# EAGLE board DF32-revision-D (EAGLE 6.6.0)
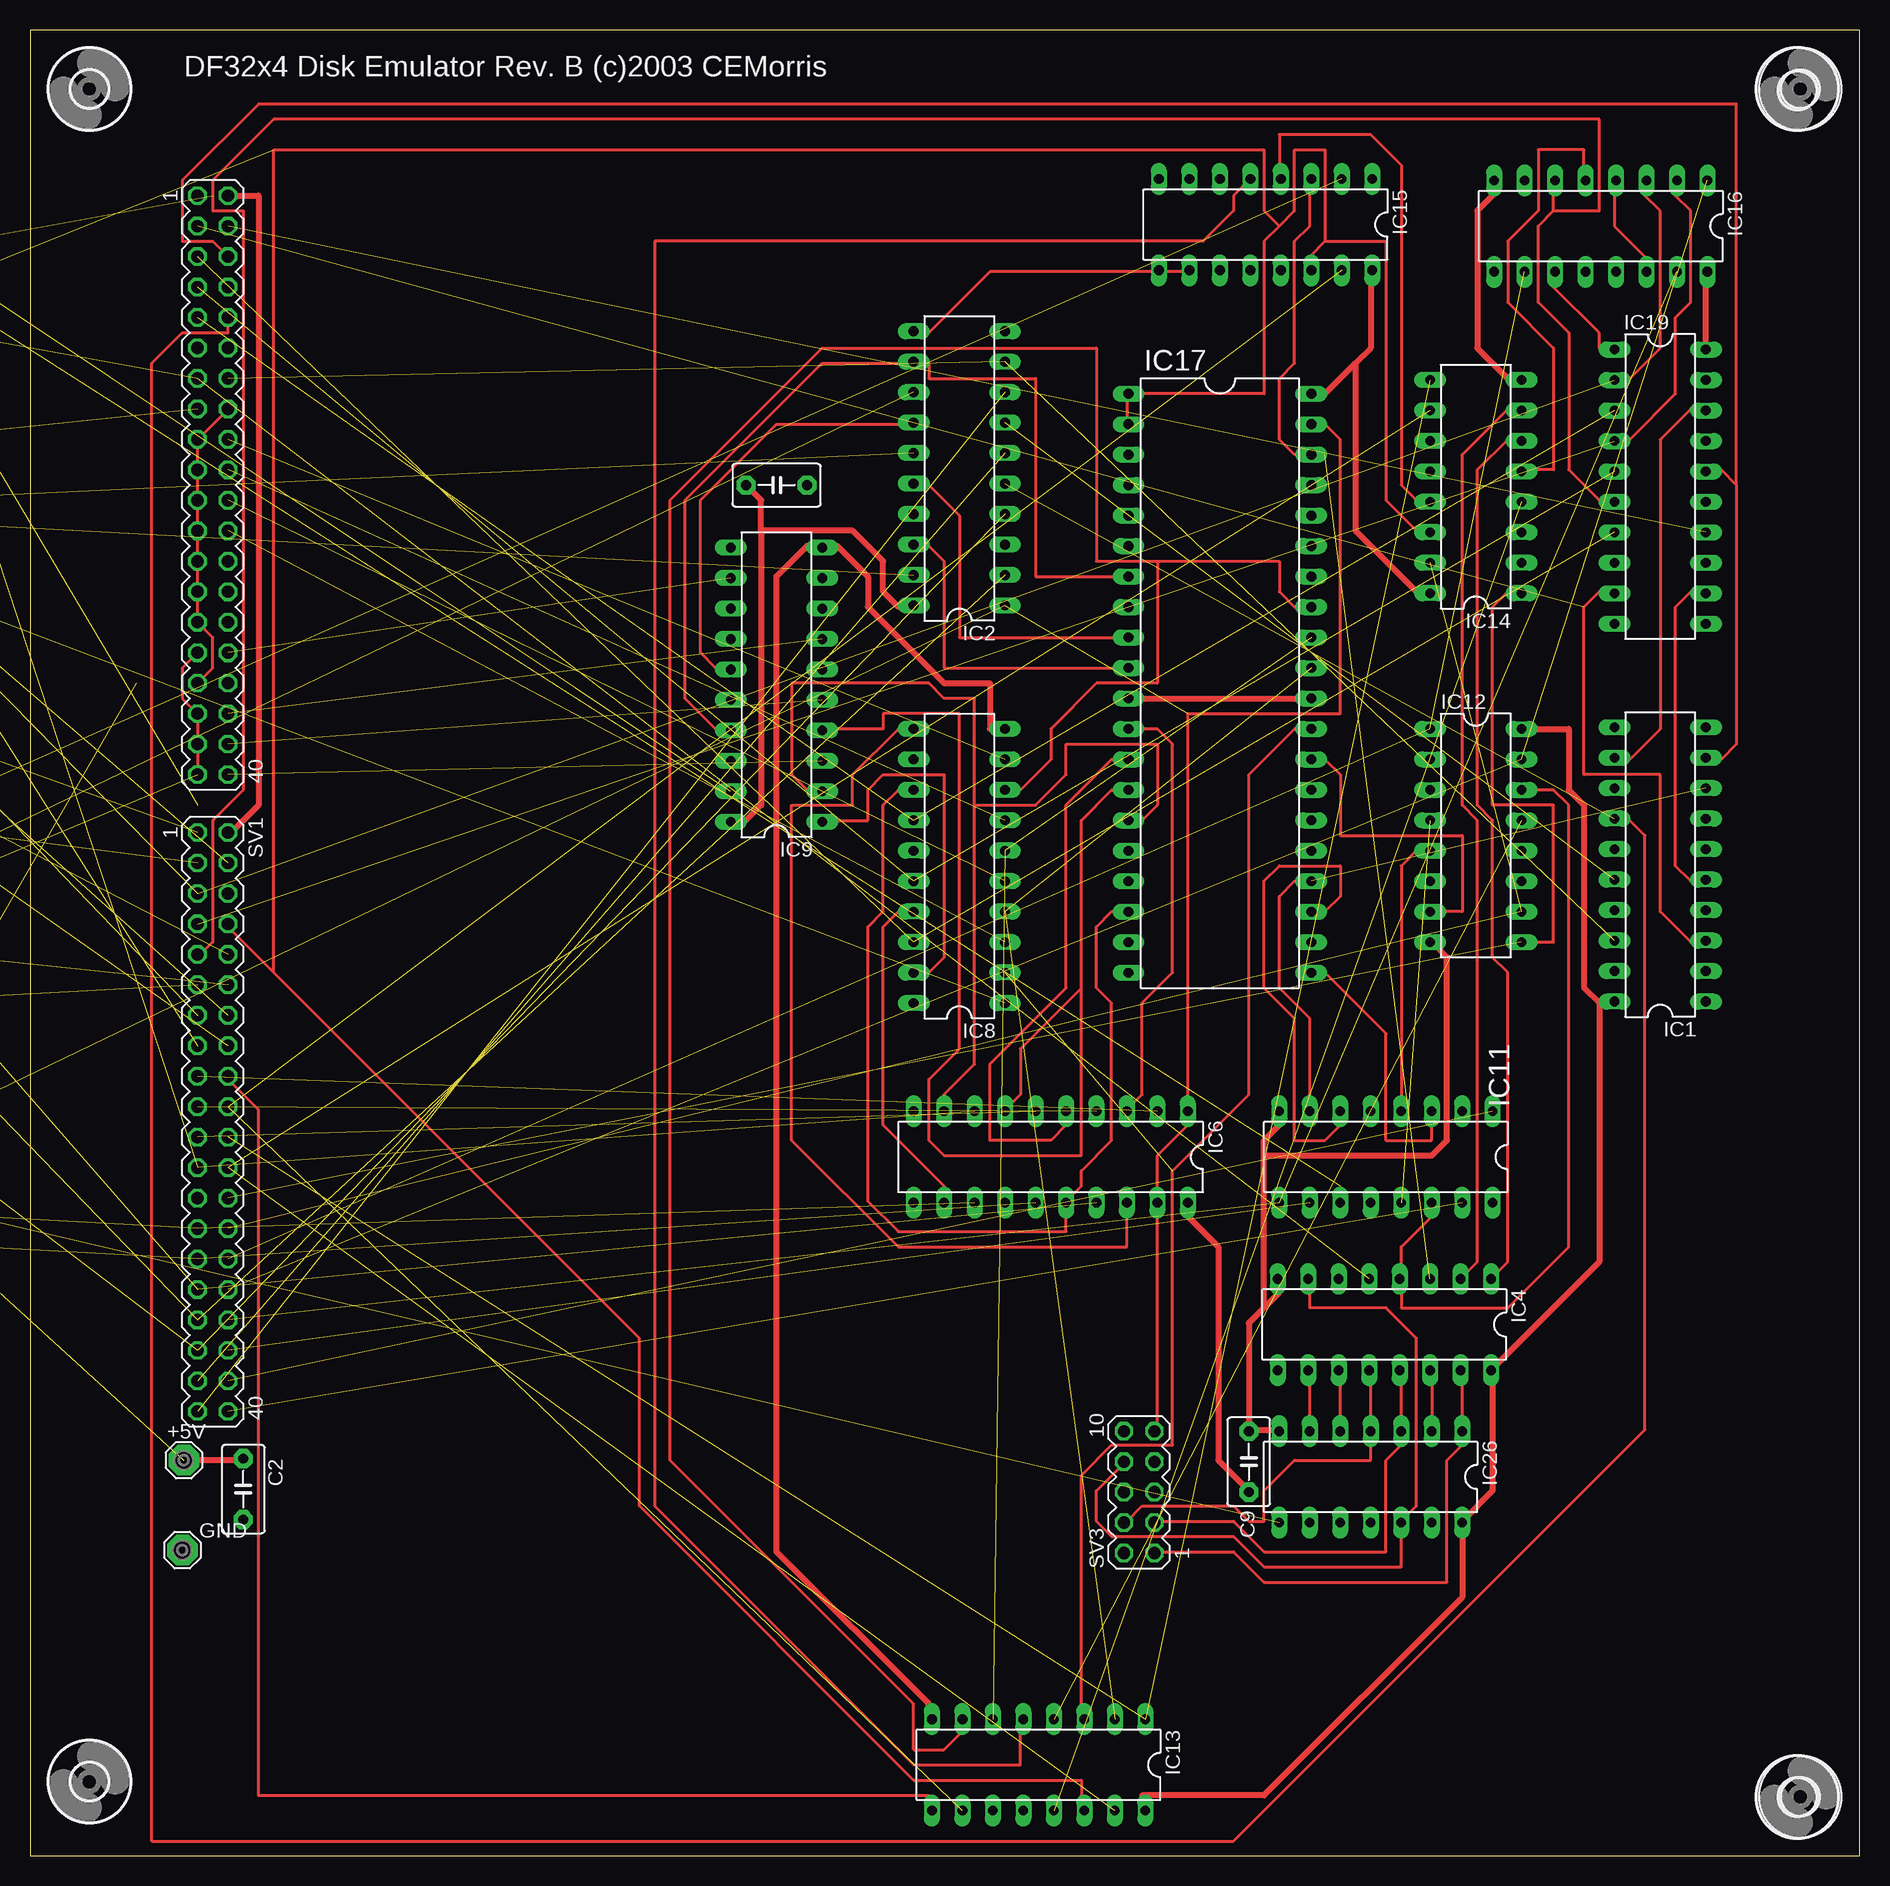
[diagram p0: board, top side]
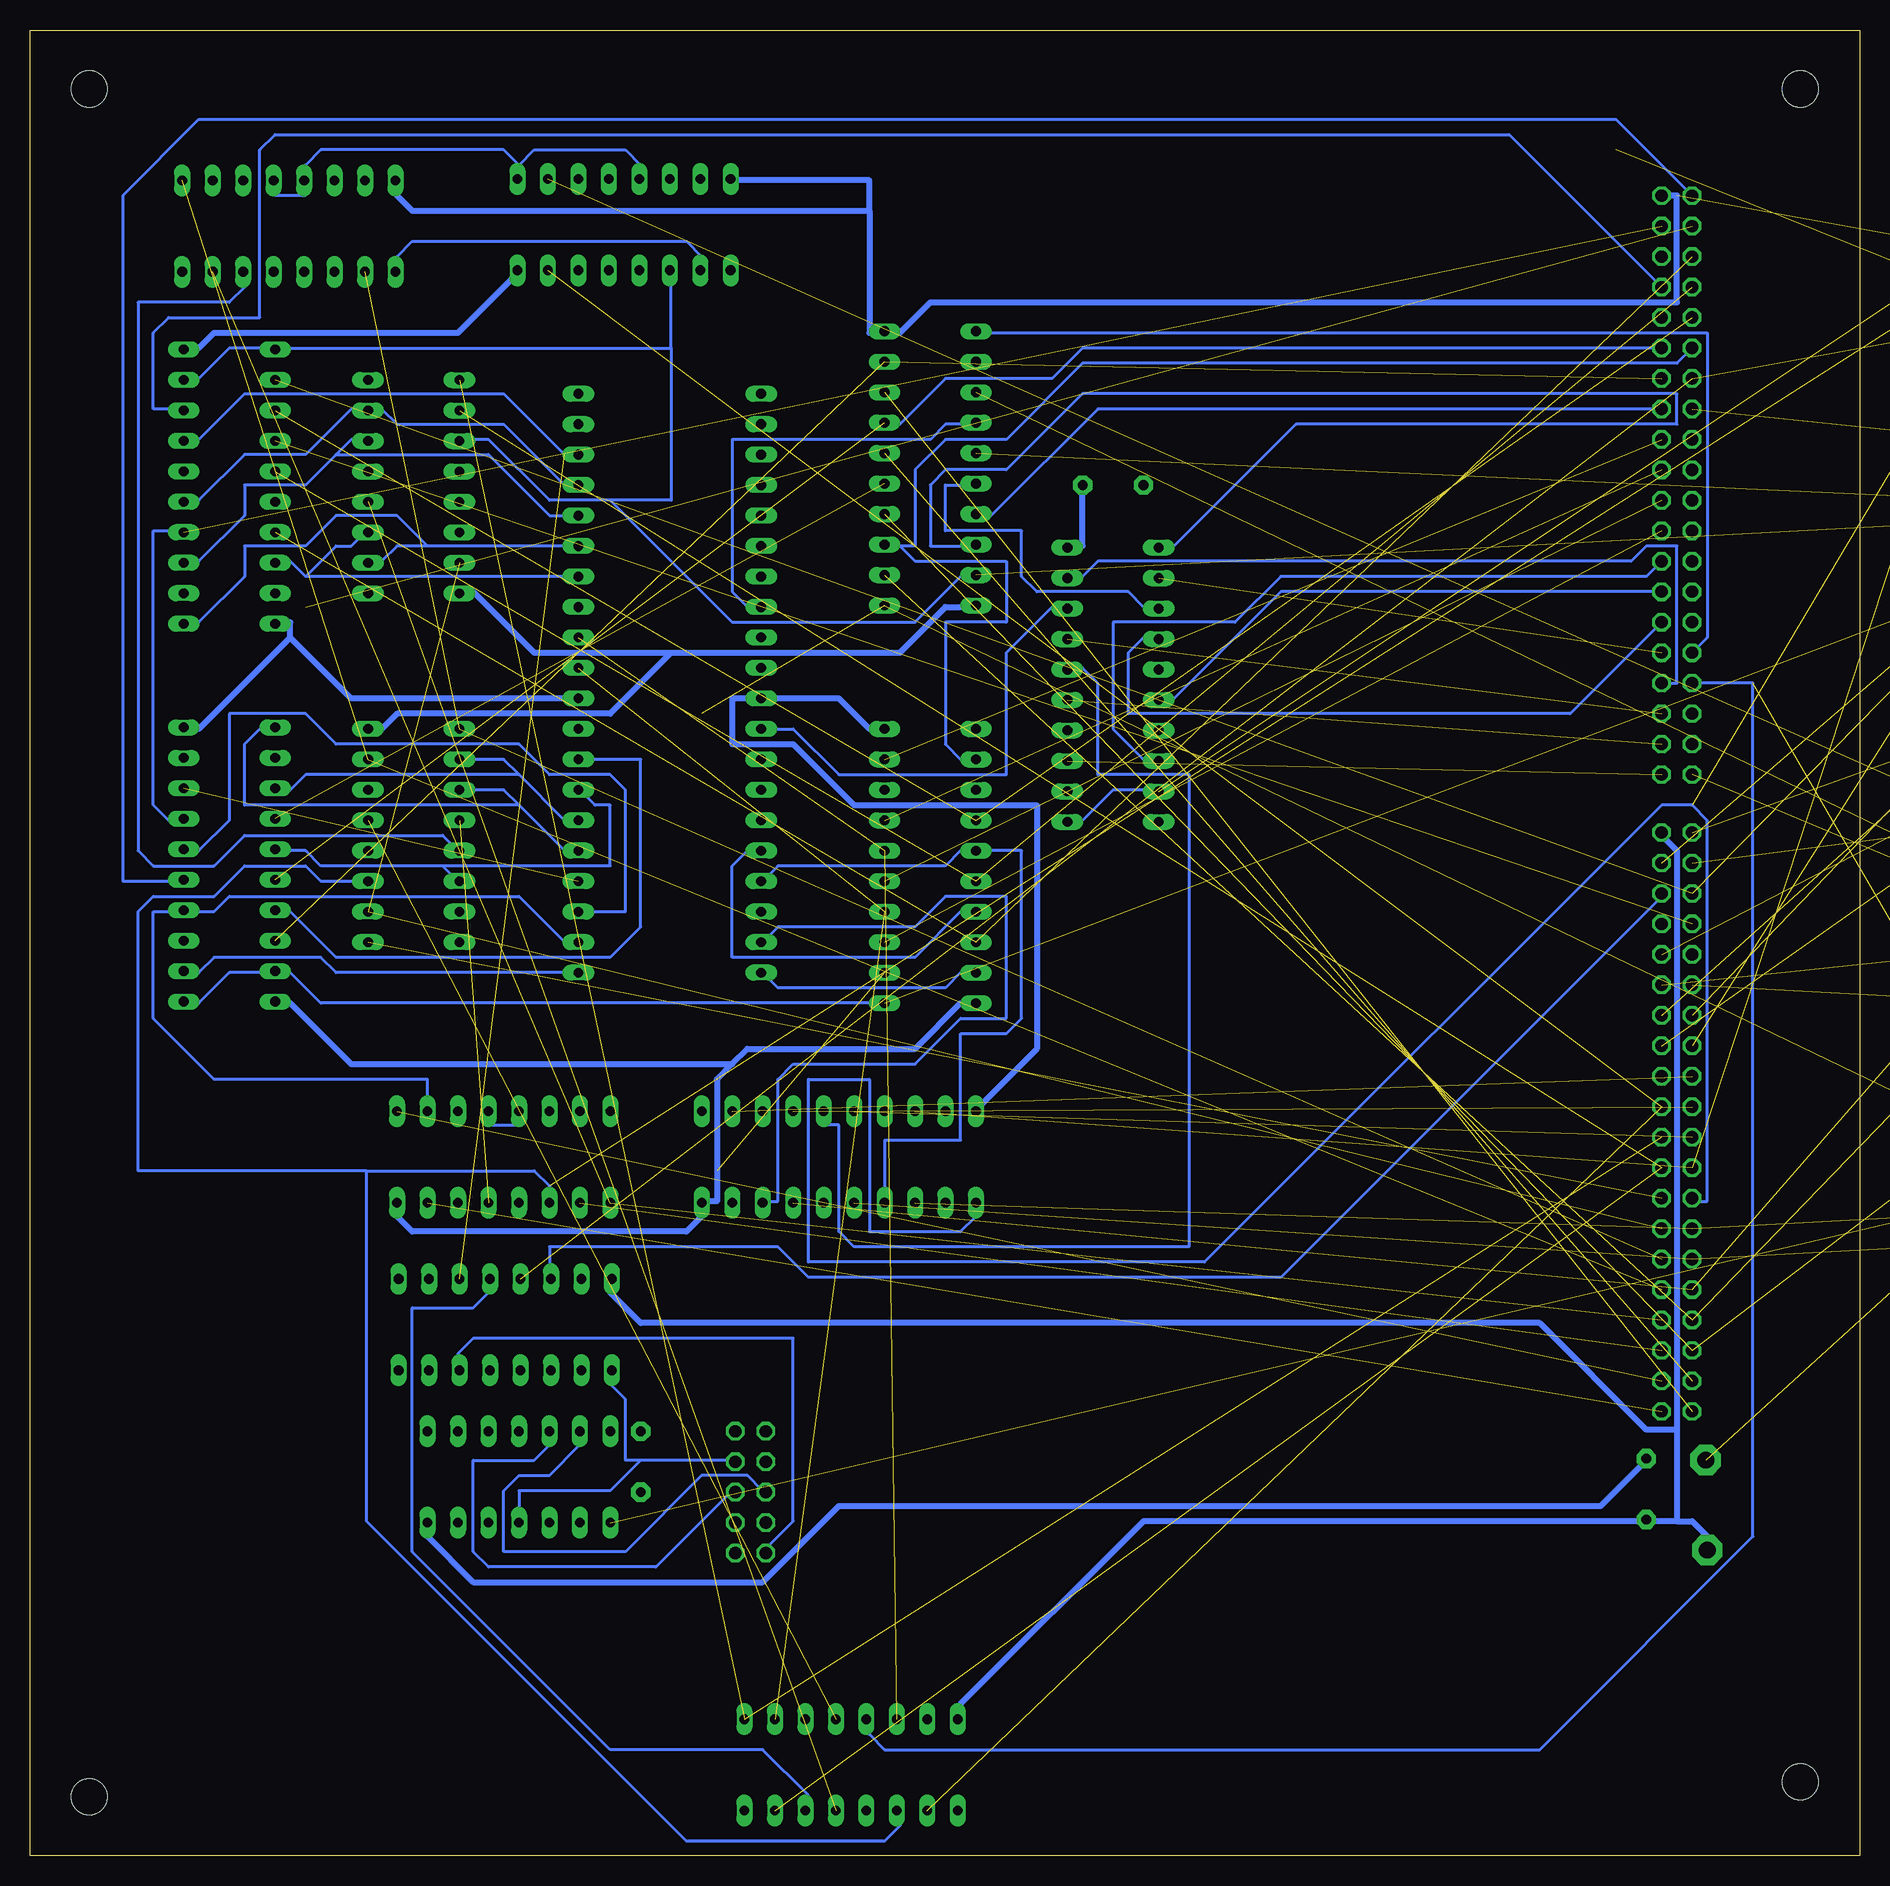
[diagram p1: board, bottom side, seen from below]

Size 152.51 x 152.2 mm. Coordinates in mm from the lower left corner, seen from the top.
Outline: 0,0 152.51,0 152.51,152.2 0,152.2 0,0
Copper layers (1*16): Top 0.035mm / dielectric 1.5mm / Bottom 0.035mm
Design rules "10mils": minimum track width 10mil, minimum drill 24mil, track to track 10mil, track to pad 10mil, pad to pad 10mil, via to via 10mil, smd to smd 10mil, copper to edge 40mil, drill to drill 10mil, minimum pad ring 10mil, minimum via ring 8mil, stop-mask expansion 0mil, vias tented up to drill 0mil, thermal gap 10mil
Net classes: 1 supply: width 0.508 mm

## Footprints (pad centres in the part's own frame; a part is rotated, then mirrored left to right if it is on the bottom)
SE14 = drill 1.397 pad 2.54 octagon: MP 0,0
C5B3.5 = drill 0.813 pad 1.6 octagon: 1 -2.54,0; 2 2.54,0
C-2,5 = drill 0.813 pad 1.6 octagon: 1 -1.27,0; 2 1.27,0
DIL20 = drill 0.813 long: 1 -11.43,-3.81; 2 -8.89,-3.81; 3 -6.35,-3.81; 4 -3.81,-3.81; 5 -1.27,-3.81; 6 1.27,-3.81; 7 3.81,-3.81; 8 6.35,-3.81; 9 8.89,-3.81; 10 11.43,-3.81; 11 11.43,3.81; 12 8.89,3.81; 13 6.35,3.81; 14 3.81,3.81; 15 1.27,3.81; 16 -1.27,3.81; 17 -3.81,3.81; 18 -6.35,3.81; 19 -8.89,3.81; 20 -11.43,3.81
DIL14 = drill 0.813 long: 1 -7.62,-3.81; 2 -5.08,-3.81; 3 -2.54,-3.81; 4 0,-3.81; 5 2.54,-3.81; 6 5.08,-3.81; 7 7.62,-3.81; 8 7.62,3.81; 9 5.08,3.81; 10 2.54,3.81; 11 0,3.81; 12 -2.54,3.81; 13 -5.08,3.81; 14 -7.62,3.81
DIL16 = drill 0.813 long: 1 -8.89,-3.81; 2 -6.35,-3.81; 3 -3.81,-3.81; 4 -1.27,-3.81; 5 1.27,-3.81; 6 3.81,-3.81; 7 6.35,-3.81; 8 8.89,-3.81; 9 8.89,3.81; 10 6.35,3.81; 11 3.81,3.81; 12 1.27,3.81; 13 -1.27,3.81; 14 -3.81,3.81; 15 -6.35,3.81; 16 -8.89,3.81
DIL40 = drill 0.813 long: 1 -24.13,-7.62; 2 -21.59,-7.62; 3 -19.05,-7.62; 4 -16.51,-7.62; 5 -13.97,-7.62; 6 -11.43,-7.62; 7 -8.89,-7.62; 8 -6.35,-7.62; 9 -3.81,-7.62; 10 -1.27,-7.62; 11 1.27,-7.62; 12 3.81,-7.62; 13 6.35,-7.62; 14 8.89,-7.62; 15 11.43,-7.62; 16 13.97,-7.62; 17 16.51,-7.62; 18 19.05,-7.62; 19 21.59,-7.62; 20 24.13,-7.62; 21 24.13,7.62; 22 21.59,7.62; 23 19.05,7.62; 24 16.51,7.62; 25 13.97,7.62; 26 11.43,7.62; 27 8.89,7.62; 28 6.35,7.62; 29 3.81,7.62; 30 1.27,7.62; 31 -1.27,7.62; 32 -3.81,7.62; 33 -6.35,7.62; 34 -8.89,7.62; 35 -11.43,7.62; 36 -13.97,7.62; 37 -16.51,7.62; 38 -19.05,7.62; 39 -21.59,7.62; 40 -24.13,7.62
TO92 = drill 0.813 octagon: 1 1.27,0; 2 0,1.905; 3 -1.27,0
R-5 = drill 0.813 pad 1.6 octagon: 1 -2.54,0; 2 2.54,0
R-7,5 = drill 0.813 pad 1.6 octagon: 1 -3.81,0; 2 3.81,0
MA20-2 = drill 1.016 octagon: 1 -24.13,-1.27; 2 -24.13,1.27; 3 -21.59,-1.27; 4 -21.59,1.27; 5 -19.05,-1.27; 6 -19.05,1.27; 7 -16.51,-1.27; 8 -16.51,1.27; 9 -13.97,-1.27; 10 -13.97,1.27; 11 -11.43,-1.27; 12 -11.43,1.27; 13 -8.89,-1.27; 14 -8.89,1.27; 15 -6.35,-1.27; 16 -6.35,1.27; 17 -3.81,-1.27; 18 -3.81,1.27; 19 -1.27,-1.27; 20 -1.27,1.27; 21 1.27,-1.27; 22 1.27,1.27; 23 3.81,-1.27; 24 3.81,1.27; 25 6.35,-1.27; 26 6.35,1.27; 27 8.89,-1.27; 28 8.89,1.27; 29 11.43,-1.27; 30 11.43,1.27; 31 13.97,-1.27; 32 13.97,1.27; 33 16.51,-1.27; 34 16.51,1.27; 35 19.05,-1.27; 36 19.05,1.27; 37 21.59,-1.27; 38 21.59,1.27; 39 24.13,-1.27; 40 24.13,1.27
MA05-2 = drill 1.016 octagon: 1 -5.08,-1.27; 2 -5.08,1.27; 3 -2.54,-1.27; 4 -2.54,1.27; 5 0,-1.27; 6 0,1.27; 7 2.54,-1.27; 8 2.54,1.27; 9 5.08,-1.27; 10 5.08,1.27
MA04-2 = drill 1.016 octagon: 1 -3.81,-1.27; 2 -3.81,1.27; 3 -1.27,-1.27; 4 -1.27,1.27; 5 1.27,-1.27; 6 1.27,1.27; 7 3.81,-1.27; 8 3.81,1.27
3,0 = hole 3: 0,0

## Placement (x,y rotation side)
+5V  SE14  [SE14]  12.82,32.98 0 top
C1  [C5B3.5]  -61.85,48.1 90 top  (outside the outline)
C2  [C5B3.5]  17.78,30.57 270 top
C3  [C5B3.5]  -41.91,116.93 0 top  (outside the outline)
C4  [C5B3.5]  -44.46,91.02 0 top  (outside the outline)
C5  [C5B3.5]  -59.19,72.99 0 top  (outside the outline)
C6  [C5B3.5]  -29.98,47.08 0 top  (outside the outline)
C7  [C5B3.5]  -17.79,63.34 90 top  (outside the outline)
C8  [C5B3.5]  -60.97,123.15 90 top  (outside the outline)
C9  [C5B3.5]  101.59,32.86 90 top
C10  [C5B3.5]  62.22,114.26 0 top
C11  [C-2,5]  -27.95,68.54 0 top  (outside the outline)
GND  SE14  [SE14]  12.69,25.49 0 top
IC1  74LS240N  [DIL20]  135.88,82.64 90 top
IC2  74LS244N  [DIL20]  77.47,115.66 90 top
IC3  74LS00N  [DIL14]  -10.17,126.84 90 top  (outside the outline)
IC4  74LS138N  [DIL16]  112.9,44.29 180 top
IC5  74LS32N  [DIL14]  -45.6,58.26 90 top  (outside the outline)
IC6  74LS244N  [DIL20]  85.09,58.26 180 top
IC7  74LS74N  [DIL14]  -43.19,106.64 90 top  (outside the outline)
IC8  74LS240N  [DIL20]  77.47,82.51 90 top
IC9  74LS240N  [DIL20]  62.22,97.62 90 top
IC10  74LS04N  [DIL14]  -29.21,128.1 180 top  (outside the outline)
IC11  74LS191N  [DIL16]  113.03,58.26 180 top
IC12  74LS191N  [DIL16]  120.52,85.05 270 top
IC13  74LS191N  [DIL16]  84.07,7.58 180 top
IC14  74LS191N  [DIL16]  120.52,114.14 90 top
IC15  74LS191N  [DIL16]  102.99,135.98 180 top
IC16  74LS191N  [DIL16]  130.93,135.85 180 top
IC17  DS1258  [DIL40]  99.18,97.75 270 top
IC18  74LS74N  [DIL14]  -45.73,81.24 90 top  (outside the outline)
IC19  74LS240N  [DIL20]  135.88,114.14 270 top
IC20  74LS02N  [DIL14]  -30.48,81.37 90 top  (outside the outline)
IC21  74LS01N  [DIL14]  -28.07,106.64 90 top  (outside the outline)
IC22  74LS155N  [DIL16]  -15.25,80.1 90 top  (outside the outline)
IC24  74LS155N  [DIL16]  -15.25,105.37 90 top  (outside the outline)
IC25  74LS74N  [DIL14]  -58.43,63.46 90 top  (outside the outline)
IC26  74LS30N  [DIL14]  111.76,31.59 180 top
IC27  74LS86N  [DIL14]  -30.36,58.38 90 top  (outside the outline)
IC28  74LS07N  [DIL14]  -58.43,93.81 90 top  (outside the outline)
Q1  2N3904  [TO92]  -53.35,132.04 0 top  (outside the outline)
R1  1K  [R-5]  -21.85,62.95 270 top  (outside the outline)
R2  1K  [R-7,5]  -13.98,62.19 270 top  (outside the outline)
R3  220  [R-5]  -58.43,106.64 180 top  (outside the outline)
R4  220  [R-5]  -47.12,43.14 180 top  (outside the outline)
R5  220  [R-5]  -49.54,48.22 270 top  (outside the outline)
R6  0  [R-5]  -10.17,62.32 270 top  (outside the outline)
R7  4.7K  [R-5]  -53.35,128.23 180 top  (outside the outline)
SV1  BUS1  [MA20-2]  15.23,61.18 270 top
SV2  BUS2  [MA20-2]  15.23,114.26 270 top
SV3  WRLOCK  [MA05-2]  92.45,30.32 90 top
SV4  PANEL LEDS  [MA04-2]  -55.76,48.22 270 top  (outside the outline)
U$1  [3,0]  4.95,147.28 0 top
U$2  [3,0]  4.95,6.18 0 top
U$3  [3,0]  147.57,4.92 0 top
U$4  [3,0]  147.57,147.28 0 top

## Library data of the parts
+5V GND = solpad
C1-C10 = capacitor-wima
C11 R1-R7 = discrete
IC1-IC16 IC18-IC22 IC24-IC28 = 74xx-us
IC17 = maxim
Q1 = transistor-npn
SV1-SV4 = con-lstb; OC_FARNELL: unknown; OC_NEWARK: unknown
U$1-U$4 = holes

## Nets
0V: IC2.17 IC7.2 IC7.12 IC11.4 IC11.5 IC12.5 IC13.5 IC14.5 IC15.1 IC15.5 IC16.4 IC16.5 IC16.14 R6.1 SV2.16 SV2.17 SV2.19 SV2.21 SV2.23 SV2.25 SV2.27 SV2.29 SV2.33
!660-663: IC5.8 IC22.2 IC24.2 IC24.14
!(NED+EWL): IC2.13 IC20.1
!ACBUS0: IC2.3 IC8.12 SV2.11
!ACBUS1: IC8.14 IC19.3 SV2.9
!ACBUS2: IC8.16 IC19.5 SV2.7
!ACBUS3: IC8.18 IC19.7 SV2.5
!ACBUS4: IC1.3 IC19.9 SV2.3
!ACBUS5: IC1.5 IC19.12 SV2.1
!ACBUS6: IC1.7 IC19.14 SV2.4
!ACBUS7: IC1.9 IC19.16 SV2.6
!ACBUS8: IC1.12 IC19.18 SV2.8
!ACBUS9: IC1.14 IC2.5 SV2.10
!ACBUS10: IC1.16 IC2.7 SV2.12
!ACBUS11: IC1.18 IC2.9 SV2.14
!ACCLEAR: IC21.1 IC28.4 IC28.6 IC28.8 IC28.12 SV1.1
!BADDAC: IC7.3 SV1.10
!BBREAK: IC4.4 IC10.13 IC11.14 IC12.14 IC13.14 IC14.14 IC15.14 IC17.1 IC17.2 SV1.8
!BRK_RQ: IC7.8 SV2.15
!BWCO: IC7.11 IC18.3 SV1.12
!DATA0: IC8.9 SV2.18
!DATA1: IC8.7 SV2.20
!DATA2: IC8.5 SV2.22
!DATA3: IC8.3 SV2.24
!DATA4: IC9.18 SV2.26
!DATA5: IC9.16 SV2.28
!DATA6: IC9.14 SV2.30
!DATA7: IC9.12 SV2.32
!DATA8: IC9.9 SV2.34
!DATA9: IC9.7 SV2.36
!DATA10: IC9.5 SV2.38
!DATA11: IC9.3 SV2.40
!DRL: IC2.15 IC7.6
!EA: IC10.10 SV1.4
!EWL: IC18.8 IC28.11
!INT_RQ: IC21.13 SV1.16
!IOP4: IC10.4 IC24.15
!IOS: IC21.4 IC21.10 IC28.2 SV1.14
!IOT601: IC22.7 IC27.12
!IOT602: IC3.12 IC24.7 IC25.3 IC28.3
!IOT604: IC3.13 IC7.4 IC24.9 IC25.1 IC28.9
!IOT612: IC24.6 IC28.1 IC28.5 IC28.13
!IOT614: IC2.19 IC14.11 IC15.11 IC16.11 IC19.1 IC19.19 IC24.10
!IOT621: IC10.5 IC22.5
!IOT622: IC10.9 IC20.11 IC24.5
!IOT624: IC1.1 IC1.19 IC8.1 IC24.11
!LAD: IC3.8 IC7.10 IC11.11 IC12.11 IC13.11
!OE: IC3.6 IC8.19 IC9.1 IC9.19 IC17.20
!SCL: IC7.1 IC7.13 IC18.1 IC18.13 IC20.10 IC25.13
!WE: IC2.1 IC6.1 IC6.19 IC17.39 IC27.9 R2.2 SV3.9
!WR1: IC4.15 IC26.1 SV3.1
!WR2: IC4.14 IC26.2 SV3.2
!WR3: IC4.13 IC26.3 SV3.3
!WR4: IC4.12 IC26.4 SV3.4
!WR5: IC4.11 IC26.5 SV3.5
!WR6: IC4.10 IC26.6 SV3.6
!WR7: IC4.9 IC26.11 SV3.7
!WR8: IC4.7 IC26.12 SV3.8
BAC0: IC13.9 SV1.18
BAC1: IC13.10 IC15.15 SV1.20
BAC2: IC13.1 IC14.9 SV1.22
BAC3: IC13.15 IC14.10 SV1.24
BAC4: IC12.9 IC14.1 SV1.26
BAC5: IC12.10 IC14.15 SV1.28
BAC6: IC12.1 IC16.10 SV1.30
BAC7: IC12.15 IC16.1 SV1.32
BAC8: IC11.9 IC16.15 SV1.34
BAC9: IC11.10 SV1.36
BAC10: IC11.1 SV1.38
BAC11: IC11.15 SV1.40
BIOP1: IC22.1 SV1.11
BIOP2: IC24.1 SV1.13
BIOP4: IC10.3 SV1.15
BMB0: IC6.2 SV1.17
BMB1: IC6.4 SV1.19
BMB2: IC6.6 SV1.21
BMB3: IC3.1 IC6.8 SV1.23
BMB4: IC3.2 IC6.11 SV1.25
BMB5: IC5.12 IC6.13 SV1.27
BMB6: IC5.13 IC6.15 SV1.29
BMB7: IC6.17 IC22.3 IC24.3 SV1.31
BMB8: IC2.2 IC22.13 IC24.13 SV1.33
BMB9: IC2.4 IC20.12 IC21.3 SV1.35
BMB10: IC2.6 SV1.37
BMB11: IC2.8 SV1.39
BRK_RQ: IC7.9 R7.2
BTS3: IC4.6 SV1.6
DATA_IN: IC3.4 IC4.5 IC25.5 SV2.13
DISK_LED: R4.1 SV4.3
DMA0: IC8.8 IC13.7 IC17.33
DMA1: IC8.6 IC13.6 IC17.32
DMA2: IC8.4 IC13.2 IC17.31
DMA3: IC8.2 IC13.3 IC17.29
DMA4: IC1.17 IC12.7 IC17.28
DMA5: IC1.15 IC12.6 IC17.27
DMA6: IC1.13 IC12.2 IC17.26
DMA7: IC1.11 IC12.3 IC17.25
DMA8: IC1.8 IC11.7 IC17.24
DMA9: IC1.6 IC11.6 IC17.23
DMA10: IC1.4 IC11.2 IC17.22
DMA11: IC1.2 IC11.3 IC17.21
DQ0: IC6.18 IC8.11 IC17.19
DQ1: IC6.16 IC8.13 IC17.18
DQ2: IC6.14 IC8.15 IC17.17
DQ3: IC6.12 IC8.17 IC17.16
DQ4: IC6.9 IC9.2 IC17.15
DQ5: IC6.7 IC9.4 IC17.14
DQ6: IC6.5 IC9.6 IC17.13
DQ7: IC6.3 IC9.8 IC17.12
DQ8: IC2.18 IC9.11 IC17.10
DQ9: IC2.16 IC9.13 IC17.9
DQ10: IC2.14 IC9.15 IC17.8
DQ11: IC2.12 IC9.17 IC17.7
DRL: IC5.2 IC7.5
EA1: IC10.11 IC16.3 IC19.2 SV1.5
EA2: IC16.2 IC19.4 SV1.7
EA3: IC16.6 IC19.6 SV1.9
EMA1: IC14.3 IC17.34 IC19.8
EMA2: IC14.2 IC17.35 IC19.11
EMA3: IC4.1 IC14.6 IC17.36 IC19.13
EMA4: IC4.2 IC14.7 IC17.37 IC19.15
EMA5: IC4.3 IC15.3 IC17.38 IC19.17
EWL: IC5.1 IC18.9 IC20.2
EWLSET: IC18.11 IC27.6
GND [supply]: C1.2 C2.2 C3.2 C4.2 C5.2 C6.2 C7.2 C8.2 C9.2 C10.2 C11.2 GND.MP IC1.10 IC2.10 IC3.7 IC4.8 IC5.7 IC6.10 IC7.7 IC8.10 IC9.10 IC10.7 IC11.8 IC12.8 IC13.8 IC14.8 IC15.8 IC16.8 IC17.11 IC17.30 IC18.7 IC19.10 IC20.7 IC21.7 IC22.8 IC24.8 IC25.7 IC26.7 IC27.7 IC28.7 Q1.3 R6.2 SV1.2 SV2.2 SV4.5 SV4.7
IOT601: IC20.9 IC27.11
IOT621: IC10.6 IC21.9
LAD: IC3.9 IC3.10 IC3.11
N$1: C11.1 IC27.5 IC27.8
N$2: IC5.6 IC21.11 IC21.12
N$3: IC28.10 R3.2
N$4: IC3.5 IC10.12
N$5: Q1.1 R4.2
N$6: R5.2 SV4.6
N$10: IC13.13 IC14.4
N$11: IC12.13 IC13.4
N$12: IC11.13 IC12.4
N$13: IC3.3 IC5.9
N$14: IC14.13 IC15.4
N$15: IC5.10 IC5.11
N$17: IC20.13 IC21.5
N$19: IC5.3 IC20.5
N$21: IC10.8 IC21.2
N$22: IC26.8 IC27.4
N$23: Q1.2 R7.1
NED: IC5.4 IC20.3 IC20.6 IC25.9
NEDSET: IC15.2 IC25.11
NOERR: IC20.4 IC21.8
PWRCLR: IC20.8 IC25.4 SV1.3
TRC: IC5.5 IC18.5 IC21.6
V+: IC2.11 IC15.9 IC15.10 IC16.9 IC18.2 IC18.4 IC18.10 IC18.12 IC22.14 IC22.15 IC25.2 IC25.10 IC25.12 IC27.1 IC27.2 IC27.10 IC27.13 R1.1 R2.1 SV2.31 SV2.35 SV2.37 SV2.39
VCC [supply]: +5V.MP C1.1 C2.1 C3.1 C4.1 C5.1 C6.1 C7.1 C8.1 C9.1 C10.1 IC1.20 IC2.20 IC3.14 IC4.16 IC5.14 IC6.20 IC7.14 IC8.20 IC9.20 IC10.14 IC11.16 IC12.16 IC13.16 IC14.16 IC15.16 IC16.16 IC17.40 IC18.14 IC19.20 IC20.14 IC21.14 IC22.16 IC24.16 IC25.14 IC26.14 IC27.14 IC28.14 R1.2 R5.1 SV4.2 SV4.4 SV4.8
WRITELOCK_LED: R3.1 SV4.1

## Tracks (layer width: path | path; a pad name or v marks a point on that pad's centre or on a via)
0V  (3 unrouted)
  Top 0.254: IC12.5 115.56,83.78 114.3,82.51 IC11.4 | IC14.5 124.45,115.53 127,115.53 127,125.69 123.19,129.5 123.19,134.58 125.73,137.12 125.73,142.2 129.53,142.2 129.53,140.93 IC16.5 | IC16.14 134.62,133.31 132.08,135.85 132.08,138.39 IC16.4 | SV2.16 SV2.17 SV2.19 SV2.21 SV2.23 SV2.25 SV2.27 SV2.29 15.23,101.56 15.23,99.02 SV2.33 | IC15.5 100.33,138.39 100.33,137.12 97.79,134.58 52.06,134.58 52.06,29.17 73.66,7.58 82.55,7.58 82.55,10.12 IC13.5
  Bottom 0.254: IC11.5 111.76,60.92 114.3,60.92 IC11.4 | 111.76,140.93 110.48,142.2 102.87,142.2 101.59,140.93 IC15.5 | IC16.4 132.08,138.39 129.53,138.39 IC16.5 129.53,140.93 128.27,142.2 113.03,142.2 111.76,140.93 | 111.76,140.93 IC15.1 | IC12.5 116.84,83.78 118.11,85.05 134.62,85.05 137.16,82.51 142.24,82.51 143.5,83.78 143.5,129.5 135.88,129.5 134.62,130.77 IC16.14 | SV2.16 63.49,120.61 72.39,111.72 IC2.17 | SV2.33 8.88,97.75 8.88,26.63 26.67,8.85 81.28,8.85 82.55,10.12 IC13.5
!660-663  (3 unrouted)
!(NED+EWL)  (1 unrouted)
!ACBUS0
  Bottom 0.254: 80.01,109.18 78.73,107.91 71.12,107.91 71.12,102.83 76.2,102.83 76.2,92.67 74.93,91.4 IC8.12 | SV2.11 15.23,124.42 64.77,124.42 71.12,118.07 76.2,118.07 78.73,115.53 78.73,109.18 80.01,109.18 | 80.01,109.18 IC2.3
!ACBUS1  (2 unrouted)
!ACBUS2  (2 unrouted)
!ACBUS3  (2 unrouted)
!ACBUS4  (1 unrouted)
  Top 0.254: IC19.9 130.81,105.37 129.53,104.1 129.53,90.13 135.88,90.13 135.88,78.7 138.43,76.16 IC1.3
!ACBUS5
  Top 0.254: IC1.5 138.43,81.24 137.16,82.51 137.16,104.1 138.43,105.37 IC19.12
  Bottom 0.254: SV2.1 20.32,144.74 138.43,144.74 144.78,138.39 144.78,81.24 140.97,81.24 IC1.5
!ACBUS6  (1 unrouted)
  Bottom 0.254: IC1.7 140.97,86.32 142.24,87.59 142.24,110.45 140.97,110.45 IC19.14
!ACBUS7
  Top 0.254: 142.24,114.26 142.24,92.67 140.97,91.4 IC1.9 | 142.24,114.26 140.97,115.53 IC19.16 | SV2.6 15.23,134.58 12.69,134.58 12.69,139.66 19.05,146.01 142.24,146.01 142.24,114.26
!ACBUS8
  Top 0.254: IC1.12 133.34,91.4 135.88,93.94 135.88,118.07 138.43,120.61 IC19.18
  Bottom 0.254: SV2.8 29.21,143.47 132.08,143.47 133.34,142.2 133.34,128.23 140.97,128.23 142.24,126.96 142.24,120.61 140.97,120.61 IC19.18
!ACBUS9  (1 unrouted)
  Top 0.254: SV2.10 16.51,126.96 12.69,126.96 10.15,124.42 10.15,1.23 100.33,1.23 134.62,35.52 134.62,85.05 133.34,86.32 IC1.14
!ACBUS10  (1 unrouted)
  Bottom 0.254: SV2.12 64.77,125.69 67.31,123.15 76.2,123.15 80.01,119.34 IC2.7
!ACBUS11  (2 unrouted)
!ACCLEAR  (5 unrouted)
!BADDAC  (1 unrouted)
!BBREAK  (1 unrouted)
  Top 0.254: IC17.2 91.44,119.34 91.44,121.88 IC17.1 102.87,121.88 102.87,134.58 104.14,135.85 | 107.95,134.58 106.68,133.31 IC15.14 | 107.95,134.58 113.03,134.58 113.03,112.99 115.56,110.45 IC14.14 | 104.14,135.85 105.41,137.12 105.41,142.2 107.95,142.2 107.95,134.58 | IC11.14 116.84,53.3 114.3,50.76 114.3,48.22 IC4.4 114.3,46.95 114.3,45.68 123.19,45.68 128.27,50.76 128.27,87.59 127,88.86 IC12.14 | 20.32,73.62 50.79,43.14 50.79,29.17 73.66,6.31 87.62,6.31 87.62,5.04 IC13.14 | 20.32,73.62 16.51,77.43 SV1.8 | 104.14,135.85 102.87,137.12 102.87,142.2 20.32,142.2 20.32,73.62
  Bottom 0.254: IC13.14 87.62,5.04 91.44,8.85 104.14,8.85 120.65,25.36 120.65,45.68 115.56,45.68 114.3,46.95 IC4.4
!BRK_RQ  (1 unrouted)
!BWCO  (2 unrouted)
!DATA0  (1 unrouted)
!DATA1  (1 unrouted)
!DATA2  (1 unrouted)
!DATA3  (1 unrouted)
!DATA4
  Bottom 0.254: SV2.26 17.78,106.64 48.25,106.64 52.06,102.83 62.22,102.83 62.22,93.94 59.68,91.4 IC9.18
!DATA5
  Bottom 0.254: SV2.28 48.25,105.37 57.14,96.48 IC9.16
!DATA6
  Bottom 0.254: SV2.30 24.12,95.21 60.95,95.21 60.95,100.29 59.68,101.56 IC9.14
!DATA7  (1 unrouted)
!DATA8
  Bottom 0.254: SV2.34 15.23,97.75 15.23,109.18 17.78,109.18 19.05,107.91 63.49,107.91 64.77,106.64 IC9.9
!DATA9  (1 unrouted)
!DATA10  (1 unrouted)
!DATA11  (1 unrouted)
!DRL  (1 unrouted)
!EA  (1 unrouted)
!EWL  (1 unrouted)
!INT_RQ  (1 unrouted)
!IOP4  (1 unrouted)
!IOS  (3 unrouted)
!IOT601  (1 unrouted)
!IOT602  (3 unrouted)
!IOT604  (4 unrouted)
!IOT612  (3 unrouted)
!IOT614  (1 unrouted)
  Top 0.254: IC16.11 127,130.77 130.81,126.96 130.81,125.69 IC19.1
  Bottom 0.254: IC19.19 138.43,123.15 135.88,125.69 133.34,125.69 IC19.1 130.81,125.69 99.06,125.69 | 104.14,112.99 93.98,102.83 78.73,102.83 74.93,106.64 IC2.19 | 104.14,112.99 109.22,112.99 114.3,118.07 115.56,118.07 IC14.11 | 99.06,125.69 99.06,112.99 104.14,112.99 | 99.06,125.69 99.06,132.04 IC15.11
!IOT621  (1 unrouted)
!IOT622  (2 unrouted)
!IOT624  (1 unrouted)
  Bottom 0.254: IC8.1 128.27,71.08 130.81,73.62 IC1.19 133.34,73.62 135.88,73.62 138.43,71.08 IC1.1
!LAD  (2 unrouted)
  Bottom 0.254: 124.45,57.11 124.45,27.9 97.79,1.23 81.28,1.23 80.01,2.5 IC13.11 | 124.45,57.11 110.48,57.11 109.22,55.84 IC11.11 | 124.45,57.11 143.5,57.11 143.5,78.7 142.24,79.97 137.16,79.97 134.62,82.51 129.53,82.51 128.27,81.24 IC12.11
!OE  (1 unrouted)
  Top 0.254: IC9.1 67.31,86.32 69.84,86.32 69.84,88.86 71.12,90.13 76.2,90.13 76.2,74.89 74.93,73.62 IC8.19
  Bottom 0.254: IC9.1 64.77,86.32 62.22,88.86 59.68,88.86 IC9.19 | IC8.19 74.93,73.62 76.2,72.35 90.17,72.35 91.44,73.62 IC17.20
!SCL  (5 unrouted)
!WE  (3 unrouted)
  Top 0.254: SV3.9 93.98,35.52 IC6.19 93.98,58.38 96.52,60.92 IC6.1 96.52,95.21 109.22,95.21 109.22,118.07 107.95,119.34 IC17.39
!WR1
  Top 0.254: IC4.15 119.38,39.33 IC26.1 119.38,34.25 118.11,32.98 118.11,22.82 102.87,22.82 100.33,25.36 93.98,25.36 SV3.1
!WR2
  Top 0.254: IC26.2 116.84,39.33 IC4.14
  Bottom 0.254: SV3.2 91.44,25.36 88.9,27.9 88.9,43.14 115.56,43.14 116.84,41.87 116.84,40.6 IC4.14
!WR3
  Top 0.254: IC4.13 114.3,39.33 IC26.3 114.3,34.25 113.03,32.98 113.03,25.36 102.87,25.36 100.33,27.9 93.98,27.9 SV3.3
!WR4
  Top 0.254: IC4.12 111.76,39.33 IC26.4 111.76,32.98 105.41,32.98 102.87,30.44 102.87,27.9 101.59,27.9 100.33,29.17 92.7,29.17 91.44,27.9 SV3.4
!WR5
  Top 0.254: IC26.5 109.22,39.33 IC4.11
  Bottom 0.254: SV3.5 93.98,30.44 100.33,24.09 114.3,24.09 115.56,25.36 115.56,32.98 110.48,32.98 109.22,34.25 IC26.5
!WR6
  Top 0.254: IC26.6 106.68,39.33 IC4.10
  Bottom 0.254: SV3.6 91.44,30.44 92.7,31.71 96.52,31.71 102.87,25.36 113.03,25.36 113.03,30.44 111.76,31.71 109.22,31.71 106.68,34.25 IC26.6
!WR7
  Bottom 0.254: 101.59,32.98 104.14,30.44 111.76,30.44 IC26.11 | 101.59,32.98 93.98,32.98 SV3.7 | 101.59,32.98 102.87,32.98 102.87,38.06 104.14,39.33 IC4.9
!WR8
  Top 0.254: IC4.7 106.68,46.95 106.68,45.68 113.03,45.68 115.56,43.14 115.56,29.17 114.3,27.9 IC26.12 114.3,24.09 102.87,24.09 100.33,26.63 90.17,26.63 88.9,27.9 88.9,30.44 91.44,32.98 SV3.8
BAC0
  Top 0.254: IC13.9 74.93,5.04 19.05,5.04 19.05,62.19 16.51,64.73 SV1.18
BAC1  (2 unrouted)
BAC2  (2 unrouted)
BAC3  (2 unrouted)
BAC4  (1 unrouted)
  Top 0.254: IC12.9 127,76.16 127,87.59 121.92,87.59 121.92,104.1 123.19,105.37 IC14.1
BAC5  (2 unrouted)
BAC6  (2 unrouted)
BAC7  (2 unrouted)
BAC8  (2 unrouted)
BAC9  (1 unrouted)
BAC10  (1 unrouted)
BAC11  (1 unrouted)
BIOP1  (1 unrouted)
BIOP2  (1 unrouted)
BIOP4  (1 unrouted)
BMB0  (1 unrouted)
BMB1  (1 unrouted)
BMB2  (1 unrouted)
BMB3  (2 unrouted)
BMB4  (1 unrouted)
  Bottom 0.254: IC6.11 73.66,53.3 74.93,52.03 82.55,52.03 82.55,64.73 87.62,64.73 87.62,49.49 54.6,49.49 16.51,87.59 13.96,87.59 12.69,86.32 12.69,54.57 13.96,54.57 SV1.25
BMB5  (2 unrouted)
BMB6  (2 unrouted)
BMB7  (3 unrouted)
BMB8  (3 unrouted)
BMB9  (3 unrouted)
BMB10  (1 unrouted)
BMB11  (1 unrouted)
BRK_RQ  (1 unrouted)
BTS3
  Bottom 0.254: IC4.6 109.22,48.22 109.22,50.76 90.17,50.76 87.62,48.22 48.25,48.22 16.51,79.97 SV1.6
DATA_IN  (3 unrouted)
DISK_LED  (1 unrouted)
DMA0
  Top 0.254: 93.98,107.91 104.14,107.91 104.14,105.37 105.41,104.1 IC17.33 | 93.98,107.91 88.9,107.91 88.9,125.69 66.04,125.69 53.34,112.99 53.34,32.98 73.66,12.66 73.66,8.85 76.2,8.85 77.47,10.12 IC13.7 | 93.98,107.91 93.98,97.75 88.9,97.75 85.09,93.94 85.09,91.4 82.55,88.86 IC8.8
DMA1  (2 unrouted)
DMA2  (2 unrouted)
DMA3  (1 unrouted)
  Top 0.254: IC13.3 87.62,12.66 87.62,31.71 90.17,34.25 95.25,34.25 95.25,57.11 101.59,63.46 101.59,90.13 105.41,93.94 IC17.29
DMA4
  Top 0.254: IC12.7 119.38,78.7 119.38,85.05 109.22,85.05 109.22,90.13 107.95,91.4 IC17.28
  Bottom 0.254: IC1.17 130.81,78.7 127,74.89 104.14,74.89 101.59,77.43 101.59,91.4 IC17.28
DMA5
  Bottom 0.254: 118.11,82.51 116.84,81.24 IC12.6 | 118.11,82.51 128.27,82.51 129.53,83.78 130.81,83.78 IC1.15 | 118.11,82.51 104.14,82.51 104.14,87.59 105.41,87.59 106.68,88.86 IC17.27
DMA6
  Bottom 0.254: 111.76,90.13 113.03,91.4 IC12.2 | 111.76,90.13 107.95,86.32 IC17.26 | 111.76,90.13 129.53,90.13 130.81,88.86 IC1.13
DMA7
  Bottom 0.254: 111.76,87.59 113.03,88.86 IC12.3 | 111.76,87.59 107.95,83.78 IC17.25 | 111.76,87.59 134.62,87.59 134.62,92.67 133.34,93.94 IC1.11
DMA8  (1 unrouted)
  Top 0.254: IC11.7 106.68,69.81 104.14,72.35 104.14,79.97 105.41,81.24 IC17.24
DMA9
  Top 0.254: IC11.6 109.22,60.92 107.95,59.65 105.41,59.65 105.41,69.81 102.87,72.35 102.87,81.24 104.14,82.51 109.22,82.51 109.22,79.97 107.95,78.7 IC17.23
  Bottom 0.254: IC1.6 138.43,83.78 135.88,86.32 135.88,95.21 129.53,95.21 127,92.67 111.76,92.67 109.22,90.13 104.14,90.13 102.87,88.86 102.87,78.7 IC17.23
DMA10
  Bottom 0.254: IC11.2 119.38,64.73 137.16,64.73 142.24,69.81 142.24,78.7 140.97,78.7 IC1.4 138.43,78.7 137.16,78.7 135.88,79.97 111.76,79.97 107.95,76.16 IC17.22
DMA11
  Top 0.254: IC17.21 107.95,73.62 113.03,68.54 113.03,59.65 116.84,59.65 IC11.3
  Bottom 0.254: IC1.2 138.43,73.62 137.16,74.89 128.27,74.89 127,73.62 IC17.21
DQ0
  Top 0.254: IC8.11 72.39,93.94 68.58,90.13 68.58,87.59 63.49,87.59 63.49,59.65 72.39,50.76 91.44,50.76 IC6.18
  Bottom 0.254: IC17.19 91.44,76.16 90.17,77.43 78.73,77.43 76.2,79.97 71.12,79.97 71.12,69.81 74.93,69.81 78.73,66 88.9,66 90.17,64.73 90.17,54.57 91.44,54.57 IC6.18
DQ1
  Top 0.254: IC17.18 90.17,78.7 88.9,77.43 88.9,72.35 90.17,71.08 90.17,59.65 87.62,57.11 87.62,55.84 86.36,54.57 IC6.16 86.36,52.03 72.39,52.03 69.84,54.57 69.84,77.43 71.12,78.7 71.12,87.59 72.39,88.86 IC8.13
DQ2
  Bottom 0.254: IC17.17 91.44,81.24 90.17,82.51 76.2,82.51 74.93,83.78 IC8.15 69.84,83.78 69.84,69.81 71.12,68.54 74.93,68.54 74.93,59.65 81.28,59.65 IC6.14
DQ3
  Top 0.254: IC8.17 72.39,78.7 71.12,77.43 71.12,60.92 76.2,55.84 IC6.12
  Bottom 0.254: IC17.16 92.7,83.78 93.98,82.51 93.98,74.89 78.73,74.89 74.93,78.7 IC8.17
DQ4
  Top 0.254: 78.73,87.59 78.73,66 76.2,63.46 IC6.9 | 78.73,87.59 78.73,96.48 76.2,96.48 74.93,97.75 63.49,97.75 63.49,90.13 64.77,88.86 IC9.2 | 78.73,87.59 83.81,87.59 86.36,90.13 86.36,92.67 93.98,92.67 93.98,87.59 92.7,86.32 IC17.15
DQ5
  Top 0.254: 87.62,72.35 82.55,67.27 82.55,63.46 81.28,62.19 IC6.7 | 87.62,72.35 87.62,86.32 90.17,88.86 IC17.14 | 87.62,72.35 87.62,58.38 76.2,58.38 74.93,59.65 74.93,64.73 77.47,67.27 77.47,95.21 71.12,95.21 71.12,93.94 67.31,93.94 IC9.4
DQ6
  Top 0.254: IC6.5 86.36,60.92 85.09,59.65 80.01,59.65 80.01,66 86.36,72.35 86.36,87.59 90.17,91.4 IC17.13
  Bottom 0.254: IC9.6 64.77,99.02 63.49,97.75 63.49,90.13 55.88,90.13 55.88,50.76 83.81,50.76 85.09,52.03 85.09,60.92 86.36,60.92 IC6.5
DQ7
  Top 0.254: IC6.3 91.44,62.19 92.7,63.46 92.7,71.08 95.25,73.62 95.25,92.67 93.98,93.94 IC17.12
  Bottom 0.254: IC9.8 67.31,104.1 71.12,100.29 71.12,90.13 85.09,90.13 88.9,93.94 IC17.12
DQ8
  Top 0.254: IC17.10 76.2,99.02 76.2,107.91 74.93,109.18 IC2.18
  Bottom 0.254: IC9.11 57.14,109.18 46.98,119.34 15.23,119.34 15.23,121.88 64.77,121.88 71.12,115.53 76.2,115.53 77.47,114.26 77.47,109.18 74.93,109.18 IC2.18
DQ9
  Top 0.254: IC17.9 77.47,101.56 77.47,111.72 74.93,114.26 IC2.16
  Bottom 0.254: IC9.13 59.68,104.1 60.95,105.37 68.58,105.37 69.84,106.64 69.84,110.45 76.2,110.45 76.2,114.26 74.93,114.26 IC2.16
DQ10
  Top 0.254: IC9.15 57.14,99.02 55.88,100.29 55.88,112.99 62.22,119.34 72.39,119.34 IC2.14
  Bottom 0.254: IC17.8 92.7,104.1 93.98,105.37 93.98,118.07 77.47,118.07 76.2,119.34 74.93,119.34 IC2.14
DQ11
  Top 0.254: IC9.17 57.14,93.94 54.6,96.48 54.6,112.99 66.04,124.42 72.39,124.42 IC2.12 74.93,124.42 74.93,123.15 83.81,123.15 83.81,106.64 IC17.7
DRL  (1 unrouted)
EA1  (2 unrouted)
  Top 0.254: IC19.2 133.34,123.15 135.88,125.69 135.88,137.12 134.62,138.39 IC16.3
EA2  (1 unrouted)
  Top 0.254: IC19.4 133.34,118.07 137.16,121.88 137.16,128.23 138.43,129.5 138.43,137.12 137.16,138.39 IC16.2
EA3
  Top 0.254: 127,137.12 125.73,135.85 125.73,129.5 128.27,126.96 128.27,115.53 130.81,112.99 IC19.6 | 127,137.12 127,138.39 IC16.6 | 127,137.12 130.81,137.12 130.81,144.74 20.32,144.74 15.23,139.66 15.23,137.12 17.78,137.12 17.78,88.86 15.23,86.32 15.23,76.16 13.96,74.89 SV1.9
EMA1
  Bottom 0.254: 129.53,106.64 130.81,107.91 IC19.8 | IC17.34 129.53,106.64 | 129.53,106.64 127,109.18 125.73,109.18 124.45,110.45 IC14.3
EMA2
  Bottom 0.254: 119.38,109.18 121.92,109.18 123.19,107.91 IC14.2 | IC17.35 119.38,109.18 | 119.38,109.18 121.92,111.72 127,111.72 129.53,109.18 134.62,109.18 134.62,106.64 138.43,102.83 IC19.11
EMA3
  Top 0.254: IC4.1 123.19,49.49 123.19,73.62 121.92,74.89 121.92,86.32 120.65,87.59 120.65,115.53 123.19,118.07 IC14.6
  Bottom 0.254: 127,116.8 125.73,118.07 124.45,118.07 IC14.6 | 127,116.8 129.53,114.26 134.62,114.26 134.62,111.72 138.43,107.91 IC19.13 | 127,116.8 114.3,116.8 109.22,111.72 IC17.36
EMA4
  Top 0.254: IC4.2 120.65,49.49 120.65,86.32 119.38,87.59 119.38,116.8 123.19,120.61 IC14.7
  Bottom 0.254: IC17.37 107.95,114.26 113.03,119.34 121.92,119.34 123.19,120.61 IC14.7 124.45,120.61 125.73,120.61 129.53,116.8 134.62,116.8 138.43,112.99 IC19.15
EMA5  (1 unrouted)
  Top 0.254: IC15.3 106.68,139.66 106.68,135.85 105.41,134.58 105.41,124.42 104.14,123.15 104.14,118.07 105.41,116.8 IC17.38
  Bottom 0.254: IC17.38 107.95,116.8 113.03,121.88 134.62,121.88 138.43,118.07 IC19.17
EWL  (2 unrouted)
EWLSET  (1 unrouted)
GND  (24 unrouted)
  Top 0.508: IC17.11 IC17.30 | IC8.10 80.01,93.94 80.01,97.75 76.2,97.75 69.84,104.1 69.84,106.64 67.31,109.18 IC9.10 64.77,109.18 62.22,106.64 62.22,25.36 74.93,12.66 IC13.8 | IC14.8 123.19,123.15 120.65,125.69 120.65,137.12 121.92,138.39 IC16.8 | 101.59,35.52 104.14,35.52 IC26.7 | 102.87,45.68 101.59,44.41 101.59,35.52 | 102.87,45.68 104.14,46.95 IC4.8 | 101.59,35.52 C9.2 | 102.87,45.68 102.87,58.38 | 102.87,58.38 102.87,59.65 104.14,60.92 IC11.8 | 102.87,58.38 116.84,58.38 118.11,59.65 118.11,74.89 116.84,76.16 IC12.8 | SV2.2 19.05,138.39 19.05,87.59 16.51,85.05 SV1.2
  Bottom 0.508: 130.81,101.56 138.43,93.94 IC1.10 | 130.81,101.56 130.81,102.83 IC19.10 | C10.2 64.77,109.18 IC9.10 | IC6.10 73.66,62.19 68.58,67.27 68.58,87.59 83.81,87.59 88.9,92.67 93.98,92.67 93.98,96.48 IC17.11 85.09,96.48 82.55,93.94 IC8.10 | 130.81,101.56 125.73,96.48 IC17.30 | 82.55,137.12 82.55,139.66 93.98,139.66 IC15.8 | 82.55,137.12 82.55,126.96 IC2.10 80.01,126.96 77.47,129.5 15.23,129.5 15.23,138.39 SV2.2 | 82.55,137.12 120.65,137.12 121.92,138.39 IC16.8 | 17.78,27.9 59.68,27.9 74.93,12.66 IC13.8 | 15.23,35.52 15.23,27.9 | 15.23,35.52 15.23,83.78 16.51,85.05 SV1.2 | 15.23,27.9 17.78,27.9 | 17.78,27.9 C2.2 | 15.23,27.9 13.96,27.9 12.69,26.63 GND.MP | 15.23,35.52 17.78,35.52 26.67,44.41 101.59,44.41 104.14,46.95 IC4.8
IOT601  (1 unrouted)
IOT621  (1 unrouted)
LAD  (2 unrouted)
N$1  (2 unrouted)
N$2  (2 unrouted)
N$3  (1 unrouted)
N$4  (1 unrouted)
N$5  (1 unrouted)
N$6  (1 unrouted)
N$10  (1 unrouted)
N$11  (1 unrouted)
N$12  (1 unrouted)
N$13  (1 unrouted)
N$14
  Top 0.254: IC14.13 115.56,112.99 114.3,114.26 114.3,140.93 111.76,143.47 104.14,143.47 104.14,140.93 IC15.4
N$15  (1 unrouted)
N$17  (1 unrouted)
N$19  (1 unrouted)
N$21  (1 unrouted)
N$22  (1 unrouted)
N$23  (1 unrouted)
NED  (3 unrouted)
NEDSET  (1 unrouted)
NOERR  (1 unrouted)
PWRCLR  (2 unrouted)
TRC  (2 unrouted)
V+  (15 unrouted)
  Top 0.254: SV2.39 SV2.37 SV2.35 12.69,96.48 12.69,99.02 SV2.31 | 93.98,132.04 80.01,132.04 74.93,126.96 IC2.11 | 93.98,132.04 96.52,132.04 IC15.10 | 93.98,132.04 IC15.9
  Bottom 0.254: IC16.9 121.92,133.31 120.65,134.58 97.79,134.58 96.52,133.31 IC15.10 | SV2.31 12.69,101.56 12.69,126.96 72.39,126.96 IC2.11
VCC  (24 unrouted)
  Top 0.508: C2.1 17.78,32.98 +5V.MP | IC13.16 92.7,5.04 102.87,5.04 119.38,21.55 IC26.14 119.38,27.9 121.92,30.44 121.92,39.33 IC4.16 130.81,49.49 130.81,71.08 | IC6.20 96.52,53.3 99.06,50.76 99.06,32.98 101.59,30.44 C9.1 | 130.81,71.08 129.53,72.35 129.53,87.59 128.27,88.86 128.27,93.94 IC12.16 | 60.95,110.45 60.95,112.99 C10.1 | 60.95,110.45 60.95,87.59 59.68,86.32 IC9.20 | 60.95,110.45 68.58,110.45 71.12,107.91 71.12,105.37 72.39,104.1 IC2.20 | IC19.20 139.69,130.77 IC16.16 | 110.48,124.42 111.76,125.69 111.76,132.04 IC15.16 | 110.48,124.42 107.95,121.88 IC17.40 | 110.48,124.42 110.48,110.45 115.56,105.37 IC14.16 | 130.81,71.08 IC1.20
  Bottom 0.508: C2.1 17.78,32.98 21.59,29.17 85.09,29.17 91.44,22.82 115.56,22.82 119.38,26.63 IC26.14 | IC11.16 121.92,53.3 120.65,52.03 97.79,52.03 96.52,53.3 IC6.20 96.52,54.57 95.25,54.57 95.25,64.73 93.98,66 | 93.98,66 92.7,67.27 78.73,67.27 74.93,71.08 IC8.20 | 93.98,66 125.73,66 130.81,71.08 IC1.20 | IC19.20 138.43,125.69 137.16,126.96 116.84,126.96 111.76,132.04 IC15.16 | 99.06,100.29 110.48,100.29 115.56,105.37 IC14.16 | 99.06,100.29 80.01,100.29 76.2,104.1 74.93,104.1 IC2.20 | 99.06,100.29 104.14,95.21 121.92,95.21 123.19,93.94 IC12.16
WRITELOCK_LED  (1 unrouted)
(copper drawn outside any net)
  shapes: Bottom area x1, Top area x1

## Text on the board
tNames: DF32x4 Disk Emulator Rev. B (c)2003 CEMorris